# Altium PCB Control_Board.PcbDoc
Units mil, origin at the board's own origin, x right, y up, seen from the top; angles counter-clockwise.
Board outline 4325 x 2580 mil, 2 copper layers (Top Layer, Bottom Layer); 11 components, 10 nets, 65 pads, 860 vias.
Unrouted connection lines stored in the file: 17.
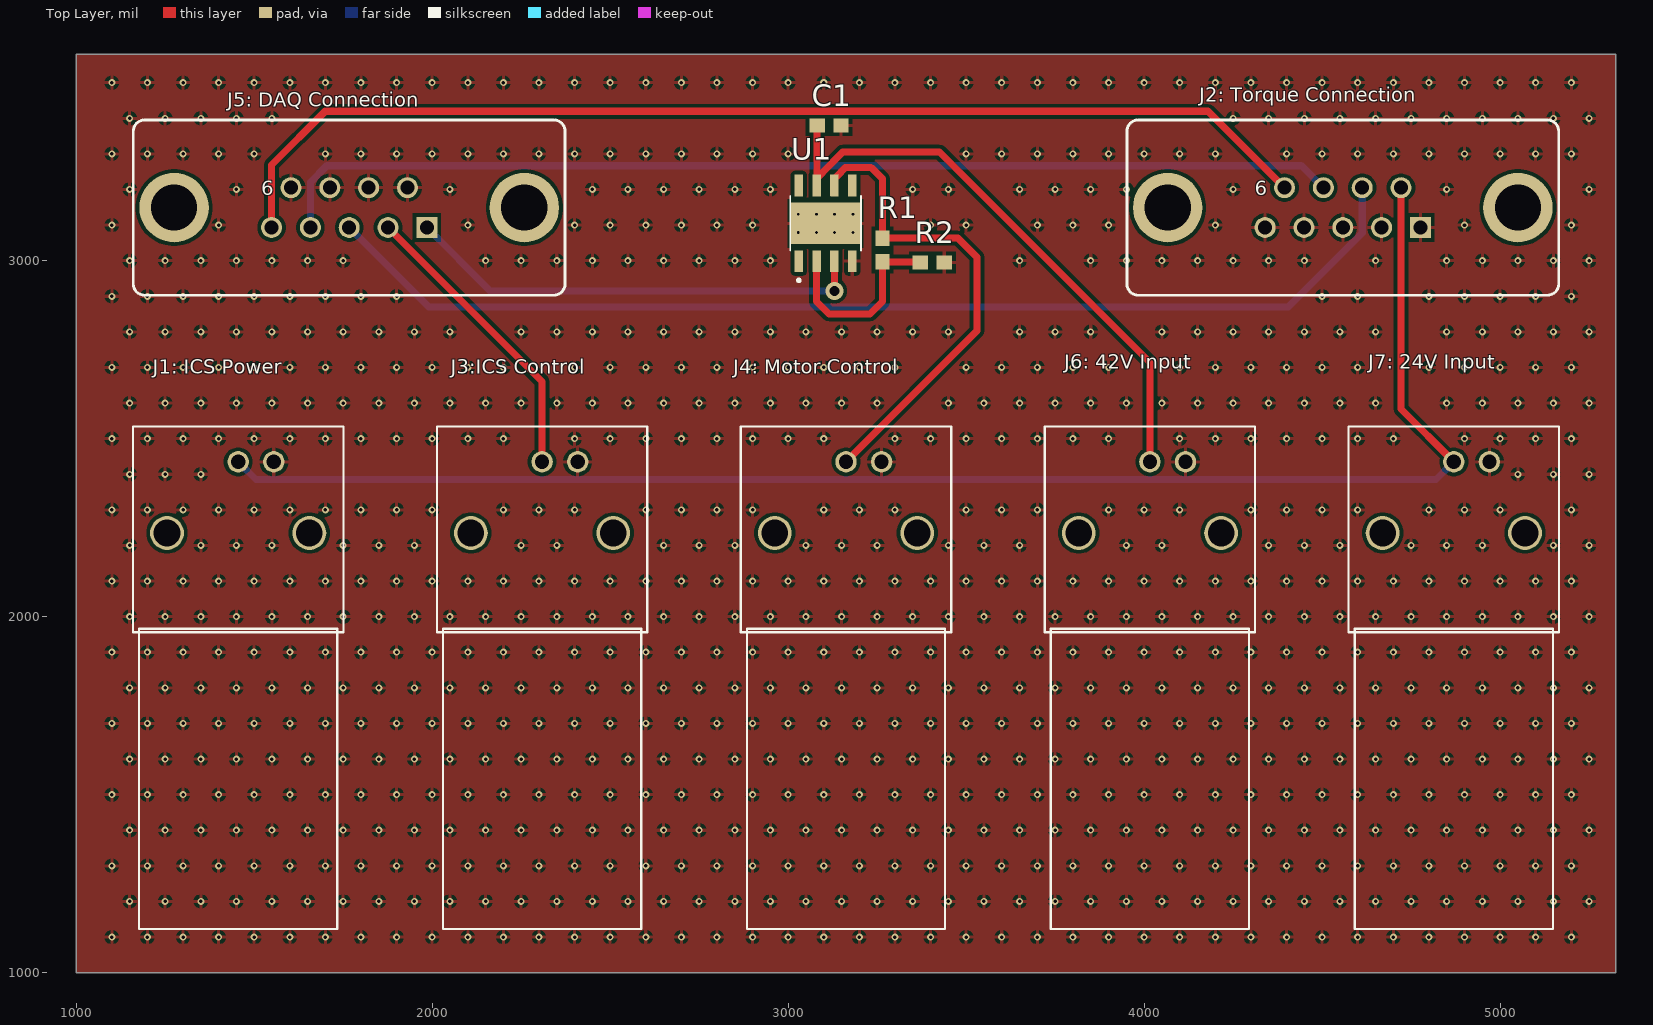
[diagram p0: Top Layer view]
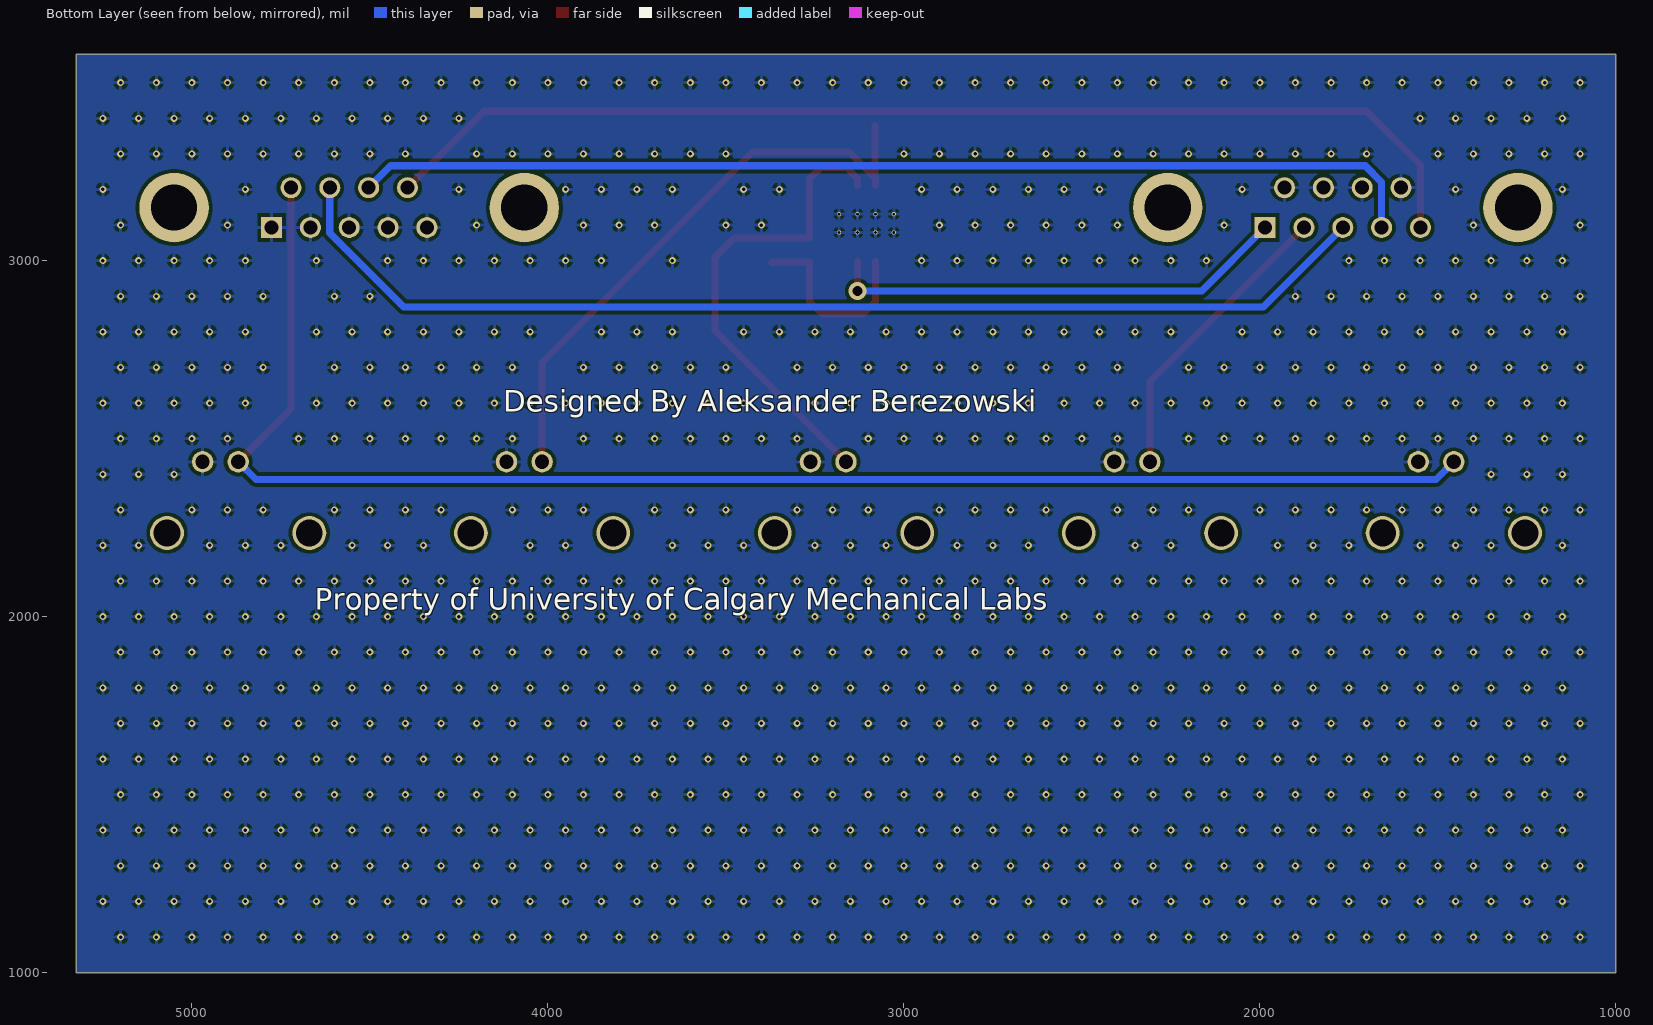
[diagram p1: Bottom Layer view, seen from below]
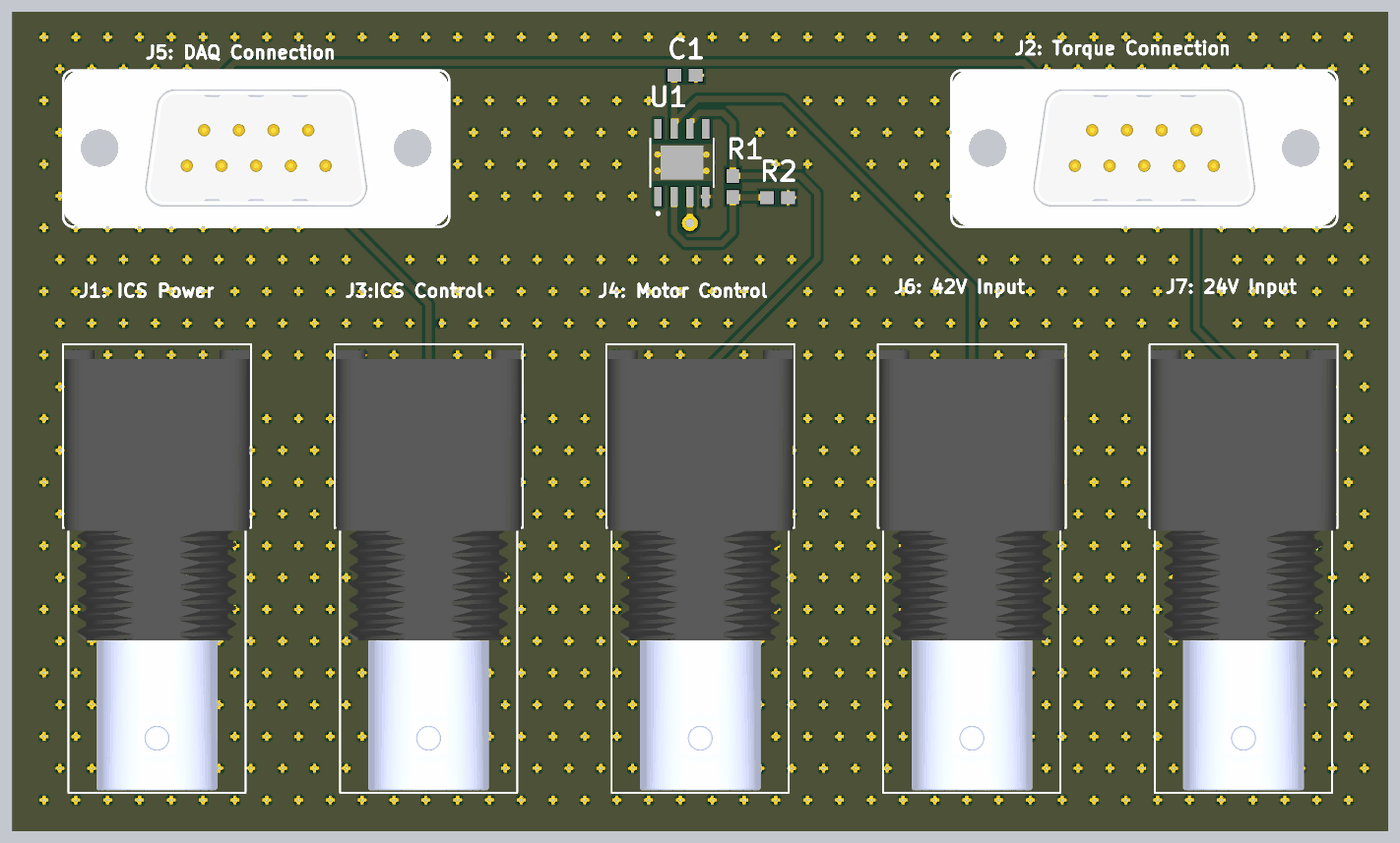
[diagram p2: 3D render of the assembled board from above, using the file's embedded part models]

## Layer stack, top to bottom
Top Solder: solder mask 0.4, Solder Resist, Dk 3.5
Top Layer: signal copper 1.4
Dielectric 1: dielectric 12.6, FR-4, Dk 4.5
Bottom Layer: signal copper 1.4
Bottom Solder: solder mask 0.4, Solder Resist, Dk 3.5

## Board outline
1000,1000 5325,1000 5325,3580 1000,3580

## Design rules (kind name [scope] priority, off if disabled: settings)
Clearance [All] p1: gap=10 ignorepadtopadclearanceinfootprint=FALSE except(0: Arc-Hole Track-Hole SMDPad-Hole THPad-Hole Via-Hole Fill-Hole Poly-Hole Region-Hole Text-Hole)
HoleSize [All] p1: absolutevalues=TRUE maxlimit=200 minlimit=1 maxpercent=80.000 minpercent=20.000
PolygonConnect [All] p1: connectstyle=Relief reliefconductorwidth=10 reliefentries=4 polygonreliefangle="90 Angle" airgapwidth=10
RoutingVias [All] p1: holewidth=28 width=50 viastyle="Through Hole" minholewidth=9 minwidth=19 maxholewidth=28 maxwidth=50
SolderMaskExpansion [All] p1: expansion=4 istentingtop=FALSE
Width [All] p1: maxlimit=20 minlimit=10 preferedwidth=20 minimp=50.000000 maximp=50.000000 favimp=50.000000
29 further rules are at their usual default settings.

## Components (designator, comment, footprint, x,y, rotation, side; value= is the part's Value field where it differs from the comment)
C1 "RF18N0R1B500CT" 0603 3115,3380 r0 top
"J1: ICS Power" "https://www.digikey.ca/en/products/detail/molex/0731375003/1465136" CONN_73137-5003_MOL 1455,2435 r180 top (schematic designator J1)
"J2: Torque Connection" "61800925023" 61800925023 4558.07,3149.09 r180 top (schematic designator J2)
"J3:ICS Control" "https://www.digikey.ca/en/products/detail/molex/0731375003/1465136" CONN_73137-5003_MOL 2308.75,2435 r180 top (schematic designator J3)
"J4: Motor Control" "https://www.digikey.ca/en/products/detail/molex/0731375003/1465136" CONN_73137-5003_MOL 3162.5,2435 r180 top (schematic designator J4)
"J5: DAQ Connection" "61800925023" 61800925023 1766.93,3149.09 r180 top (schematic designator J5)
"J6: 42V Input" "https://www.digikey.ca/en/products/detail/molex/0731375003/1465136" CONN_73137-5003_MOL 4016.25,2435 r180 top (schematic designator J6)
"J7: 24V Input" "https://www.digikey.ca/en/products/detail/molex/0731375003/1465136" CONN_73137-5003_MOL 4870,2435 r180 top (schematic designator J7)
R1 "ERJ3EKF4021V" 0603 3265,3030 r90 top
R2 "ERJ3EKF2051V" 0603 3405,2995 r180 top
U1 "OPA445ADDAR" VREG_LM5017MR/NOPB 3105,3105 r90 top

## Footprints (in the part's own frame and the unit in brackets; to place one, negate y for a bottom-side part, rotate by r counter-clockwise, add the part's x,y. Pads: shape width x height; smd on the part's side, far side on the other; paste and mask are expansions set on the pad)
0603 [mm]
  rect 1.1x1 smd: 1(-0.85,0) 2(0.85,0)
61800925023 [mm] "9 pins, straight"
  rect 1.5x1.5 hole 1: 1(-5.54,1.42)
  round 1.5 hole 1: 2(-2.77,1.42) 3(0,1.42) 4(2.77,1.42) 5(5.54,1.42) 6(-4.155,-1.42) 7(-1.385,-1.42) 8(1.385,-1.42) 9(4.155,-1.42)
  round 4.95 hole 3.3: M1(-12.495,0) M2(12.495,0)
  silkscreen extent -15.41,-6.25 15.41,6.25, body extent -15.41,-6.3 15.4,6.2, height 12.97
CONN_73137-5003_MOL [mil]
  round 60 hole 40 mask+0: 1(0,0) 2(-100,0)
  round 95 hole 75: 3(-200,200) 4(200,200)
  silkscreen extent -296,-99 296,1312, body extent -291,-80 291,1305, height 521
VREG_LM5017MR/NOPB [mm]
  rrect5% 1.55x0.6 smd mask+0: 1(-2.7,1.905) 2(-2.7,0.635) 3(-2.7,-0.635) 4(-2.7,-1.905) 5(2.7,-1.905) 6(2.7,-0.635) 7(2.7,0.635) 8(2.7,1.905)
  round 0.3 hole 0.2: 9(-0.65,1.95) 9(-0.65,-0.65) 9(-0.65,0.65) 9(-0.65,-1.95) 9(0.65,1.95) 9(0.65,-0.65) 9(0.65,0.65) 9(0.65,-1.95)
  rect 2.95x4.9 smd paste-3 mask+0: 9(0,0)
  silkscreen extent -4.17,-2.52 1.95,2.52

## Part data
"J1: ICS Power" "J3:ICS Control" "J4: Motor Control" "J6: 42V Input" "J7: 24V Input": library part 731375003, Mfr_Name="Molex Connector Corporation", Copyright="Copyright (C) 2022 Ultra Librarian. All rights reserved.", Manufacturer_Part_Number=731375003, RefDes=RefDes, Type=DEV
"J2: Torque Connection" "J5: DAQ Connection": library part CMP-1502-00276-1, "Male PCB Connector WR-DSUB, Vertical, 9 pins", Contact Resistance=30mOhm, Manufacturer="Wurth Elektronik", Operating Temperature=-40to85degC, Rated Current=3A, Working Voltage=125VAC, Datasheet URL=https://katalog.we-online.de/em/datasheet/6180xx25023.pdf, Gender=Male, Manufacturer URL=http://www.we-online.de, Mounting Technology=THT, Orientation=Vertical, Package Reference=61800925023, Packaging=Tray, Part Number=61800925023, Pin Number=9, Publisher=WurthElektronik
U1: Package=None, Availability=Unavailable, MP=OPA445ADDAR, Price=None

## Via types
v1: diameter 19.68, hole 9.84, Top Layer to Bottom Layer, 859 vias
v2: diameter 50, hole 28, Top Layer to Bottom Layer, 1 vias

## Nets (pads, with @x,y where several pads share a name; then routed paths per layer and width w, separated by ;. In a path a pad name is that pad's centre, name@x,y a point inside that pad or via, vN(x,y) a via of type N, cw(c..) or ccw(c..) an arc to the next point about the centre after c; other vN are vias at no path point)
24V: "J1: ICS Power.1" "J2: Torque Connection.6" "J7: 24V Input.1" | length 4287.9
  Top Layer w20: 4721.65,3205 4721.65,2583.35 4870,2435
  Bottom Layer w20: 1455,2435 1505,2385 4820,2385 4870,2435
42V: "J6: 42V Input.1" C1.1 U1.7 | length 1660.1
  Top Layer w20: U1.7 3080,3230 U1.7@3080.77,3230.77 ; C1.1 3080.77,3379.23 U1.7@3080.77,3230.77 ; 4016.25,2435 4016.25,2713.75 3425,3305 3153.44,3305 3096.11,3247.67 3096.11,3246.11 U1.7@3080.77,3230.77
DAQ_Vin: "J5: DAQ Connection.1" U1.3 | length 1302.5
  Top Layer w20: v2(3130,2915) U1.3
  Bottom Layer w20: 1985.04,3093.19 2163.23,2915 v2(3130,2915)
GND: "J1: ICS Power.2" "J2: Torque Connection.1" "J2: Torque Connection.2" "J2: Torque Connection.3" "J2: Torque Connection.4" "J2: Torque Connection.5" "J3:ICS Control.2" "J4: Motor Control.2" "J5: DAQ Connection.6" "J5: DAQ Connection.7" "J5: DAQ Connection.8" "J5: DAQ Connection.9" "J6: 42V Input.2" "J7: 24V Input.2" C1.2 R2.1 U1.4 U1.9
  other v1: 1100,1100 1200,1100 1300,1100 1400,1100 1500,1100 1600,1100 1700,1100 1800,1100 1900,1100 2000,1100 2100,1100 2200,1100 2300,1100 2400,1100 2500,1100 2600,1100 2700,1100 2800,1100 2900,1100 3000,1100 3100,1100 3200,1100 3300,1100 3400,1100 3500,1100 3600,1100 3700,1100 3800,1100 3900,1100 4000,1100 4100,1100 4200,1100 4300,1100 4400,1100 4500,1100 4600,1100 4700,1100 4800,1100 4900,1100 5000,1100 5100,1100 5200,1100 1150,1200 1250,1200 1350,1200 1450,1200 1550,1200 1650,1200 1750,1200 1850,1200 1950,1200 2050,1200 2150,1200 2250,1200 2350,1200 2450,1200 2550,1200 2650,1200 2750,1200 2850,1200 2950,1200 3050,1200 3150,1200 3250,1200 3350,1200 3450,1200 3550,1200 3650,1200 3750,1200 3850,1200 3950,1200 4050,1200 4150,1200 4250,1200 4350,1200 4450,1200 4550,1200 4650,1200 4750,1200 4850,1200 4950,1200 5050,1200 5150,1200 5250,1200 1100,1300 1200,1300 1300,1300 1400,1300 1500,1300 1600,1300 1700,1300 1800,1300 1900,1300 2000,1300 2100,1300 2200,1300 2300,1300 2400,1300 2500,1300 2600,1300 2700,1300 2800,1300 2900,1300 3000,1300 3100,1300 3200,1300 3300,1300 3400,1300 3500,1300 3600,1300 3700,1300 3800,1300 3900,1300 4000,1300 4100,1300 4200,1300 4300,1300 4400,1300 4500,1300 4600,1300 4700,1300 4800,1300 4900,1300 5000,1300 5100,1300 5200,1300 1150,1400 1250,1400 1350,1400 1450,1400 1550,1400 1650,1400 1750,1400 1850,1400 1950,1400 2050,1400 2150,1400 2250,1400 2350,1400 2450,1400 2550,1400 2650,1400 2750,1400 2850,1400 2950,1400 3050,1400 3150,1400 3250,1400 3350,1400 3450,1400 3550,1400 3650,1400 3750,1400 3850,1400 3950,1400 4050,1400 4150,1400 4250,1400 4350,1400 4450,1400 4550,1400 4650,1400 4750,1400 4850,1400 4950,1400 5050,1400 5150,1400 5250,1400 1100,1500 1200,1500 1300,1500 1400,1500 1500,1500 1600,1500 1700,1500 1800,1500 1900,1500 2000,1500 2100,1500 2200,1500 2300,1500 2400,1500 2500,1500 2600,1500 2700,1500 2800,1500 2900,1500 3000,1500 3100,1500 3200,1500 3300,1500 3400,1500 3500,1500 3600,1500 3700,1500 3800,1500 3900,1500 4000,1500 4100,1500 4200,1500 4300,1500 4400,1500 4500,1500 4600,1500 4700,1500 4800,1500 4900,1500 5000,1500 5100,1500 5200,1500 1150,1600 1250,1600 1350,1600 1450,1600 1550,1600 1650,1600 1750,1600 1850,1600 1950,1600 2050,1600 2150,1600 2250,1600 2350,1600 2450,1600 2550,1600 2650,1600 2750,1600 2850,1600 2950,1600 3050,1600 3150,1600 3250,1600 3350,1600 3450,1600 3550,1600 3650,1600 3750,1600 3850,1600 3950,1600 4050,1600 4150,1600 4250,1600 4350,1600 4450,1600 4550,1600 4650,1600 4750,1600 4850,1600 4950,1600 5050,1600 5150,1600 5250,1600 1100,1700 1200,1700 1300,1700 1400,1700 1500,1700 1600,1700 1700,1700 1800,1700 1900,1700 2000,1700 2100,1700 2200,1700 2300,1700 2400,1700 2500,1700 2600,1700 2700,1700 2800,1700 2900,1700 3000,1700 3100,1700 3200,1700 3300,1700 3400,1700 3500,1700 3600,1700 3700,1700 3800,1700 3900,1700 4000,1700 4100,1700 4200,1700 4300,1700 4400,1700 4500,1700 4600,1700 4700,1700 4800,1700 4900,1700 5000,1700 5100,1700 5200,1700 1150,1800 1250,1800 1350,1800 1450,1800 1550,1800 1650,1800 1750,1800 1850,1800 1950,1800 2050,1800 2150,1800 2250,1800 2350,1800 2450,1800 2550,1800 2650,1800 2750,1800 2850,1800 2950,1800 3050,1800 3150,1800 3250,1800 3350,1800 3450,1800 3550,1800 3650,1800 3750,1800 3850,1800 3950,1800 4050,1800 4150,1800 4250,1800 4350,1800 4450,1800 4550,1800 4650,1800 4750,1800 4850,1800 4950,1800 5050,1800 5150,1800 5250,1800 1100,1900 1200,1900 1300,1900 1400,1900 1500,1900 1600,1900 1700,1900 1800,1900 1900,1900 2000,1900 2100,1900 2200,1900 2300,1900 2400,1900 2500,1900 2600,1900 2700,1900 2800,1900 2900,1900 3000,1900 3100,1900 3200,1900 3300,1900 3400,1900 3500,1900 3600,1900 3700,1900 3800,1900 3900,1900 4000,1900 4100,1900 4200,1900 4300,1900 4400,1900 4500,1900 4600,1900 4700,1900 4800,1900 4900,1900 5000,1900 5100,1900 5200,1900 1150,2000 1250,2000 1350,2000 1450,2000 1550,2000 1650,2000 1750,2000 1850,2000 1950,2000 2050,2000 2150,2000 2250,2000 2350,2000 2450,2000 2550,2000 2650,2000 2750,2000 2850,2000 2950,2000 3050,2000 3150,2000 3250,2000 3350,2000 3450,2000 3550,2000 3650,2000 3750,2000 3850,2000 3950,2000 4050,2000 4150,2000 4250,2000 4350,2000 4450,2000 4550,2000 4650,2000 4750,2000 4850,2000 4950,2000 5050,2000 5150,2000 5250,2000 1100,2100 1200,2100 1300,2100 1400,2100 1500,2100 1600,2100 1700,2100 1800,2100 1900,2100 2000,2100 2100,2100 2200,2100 2300,2100 2400,2100 2500,2100 2600,2100 2700,2100 2800,2100 2900,2100 3000,2100 3100,2100 3200,2100 3300,2100 3400,2100 3500,2100 3600,2100 3700,2100 3800,2100 3900,2100 4000,2100 4100,2100 4200,2100 4300,2100 4400,2100 4500,2100 4600,2100 4700,2100 4800,2100 4900,2100 5000,2100 5100,2100 5200,2100 1150,2200 1350,2200 1450,2200 1550,2200 1750,2200 1850,2200 1950,2200 2250,2200 2350,2200 2650,2200 2750,2200 2850,2200 3050,2200 3150,2200 3250,2200 3450,2200 3550,2200 3650,2200 3950,2200 4050,2200 4350,2200 4450,2200 4550,2200 4750,2200 4850,2200 4950,2200 5150,2200 5250,2200 1100,2300 1200,2300 1300,2300 1400,2300 1500,2300 1600,2300 1700,2300 1800,2300 1900,2300 2000,2300 2200,2300 2300,2300 2400,2300 2600,2300 2700,2300 2800,2300 2900,2300 3100,2300 3200,2300 3300,2300 3500,2300 3600,2300 3700,2300 3900,2300 4000,2300 4100,2300 4300,2300 4400,2300 4500,2300 4600,2300 4800,2300 4900,2300 5000,2300 5200,2300 1150,2400 1250,2400 1350,2400 5050,2400 5150,2400 5250,2400 1100,2500 1200,2500 1300,2500 1400,2500 1500,2500 1600,2500 1700,2500 1800,2500 1900,2500 2000,2500 2100,2500 2200,2500 2400,2500 2500,2500 2600,2500 2700,2500 2800,2500 2900,2500 3000,2500 3100,2500 3300,2500 3400,2500 3500,2500 3600,2500 3700,2500 3800,2500 3900,2500 4100,2500 4200,2500 4300,2500 4400,2500 4500,2500 4600,2500 4700,2500 4900,2500 5000,2500 5100,2500 5200,2500 1150,2600 1250,2600 1350,2600 1450,2600 1550,2600 1650,2600 1750,2600 1850,2600 1950,2600 2050,2600 2150,2600 2250,2600 2350,2600 2450,2600 2550,2600 2650,2600 2750,2600 2850,2600 2950,2600 3050,2600 3150,2600 3250,2600 3450,2600 3550,2600 3650,2600 3750,2600 3850,2600 3950,2600 4050,2600 4150,2600 4250,2600 4350,2600 4450,2600 4550,2600 4650,2600 4850,2600 4950,2600 5050,2600 5150,2600 5250,2600 1100,2700 1200,2700 1300,2700 1400,2700 1500,2700 1600,2700 1700,2700 1800,2700 1900,2700 2000,2700 2100,2700 2200,2700 2400,2700 2500,2700 2600,2700 2700,2700 2800,2700 2900,2700 3000,2700 3100,2700 3200,2700 3300,2700 3500,2700 3600,2700 3700,2700 3800,2700 3900,2700 4100,2700 4200,2700 4300,2700 4400,2700 4500,2700 4600,2700 4800,2700 4900,2700 5000,2700 5100,2700 5200,2700 1150,2800 1250,2800 1350,2800 1450,2800 1550,2800 1650,2800 1750,2800 1850,2800 1950,2800 2050,2800 2250,2800 2350,2800 2450,2800 2550,2800 2650,2800 2750,2800 2850,2800 2950,2800 3050,2800 3150,2800 3250,2800 3350,2800 3450,2800 3650,2800 3750,2800 3850,2800 4050,2800 4150,2800 4250,2800 4350,2800 4450,2800 4550,2800 4650,2800 4850,2800 4950,2800 5050,2800 5150,2800 5250,2800 1100,2900 1200,2900 1300,2900 1400,2900 1500,2900 1600,2900 1700,2900 1800,2900 1900,2900 4500,2900 4600,2900 4800,2900 4900,2900 5000,2900 5100,2900 5200,2900 1150,3000 1250,3000 1350,3000 1450,3000 1550,3000 1650,3000 1750,3000 2150,3000 2250,3000 2350,3000 2450,3000 2550,3000 2650,3000 2750,3000 2850,3000 2950,3000 3650,3000 3850,3000 3950,3000 4050,3000 4150,3000 4250,3000 4350,3000 4450,3000 4650,3000 4850,3000 4950,3000 5050,3000 5150,3000 5250,3000 1100,3100 1400,3100 2100,3100 2400,3100 2500,3100 2600,3100 2700,3100 2800,3100 2900,3100 3400,3100 3500,3100 3700,3100 3800,3100 3900,3100 4200,3100 4900,3100 5200,3100 1150,3200 1450,3200 2050,3200 2450,3200 2550,3200 2650,3200 2750,3200 2850,3200 2950,3200 3350,3200 3450,3200 3650,3200 3750,3200 3850,3200 3950,3200 4250,3200 4850,3200 5250,3200 1100,3300 1200,3300 1300,3300 1400,3300 1500,3300 1700,3300 1800,3300 1900,3300 2000,3300 2100,3300 2200,3300 2300,3300 2400,3300 2500,3300 2600,3300 2700,3300 2800,3300 2900,3300 3000,3300 3500,3300 3600,3300 3700,3300 3800,3300 3900,3300 4000,3300 4100,3300 4200,3300 4400,3300 4500,3300 4600,3300 4700,3300 4800,3300 4900,3300 5000,3300 5100,3300 5200,3300 1150,3400 1250,3400 1350,3400 1450,3400 1550,3400 4250,3400 4350,3400 4450,3400 4550,3400 4650,3400 4750,3400 4850,3400 4950,3400 5050,3400 5150,3400 5250,3400 1100,3500 1200,3500 1300,3500 1400,3500 1500,3500 1600,3500 1700,3500 1800,3500 1900,3500 2000,3500 2100,3500 2200,3500 2300,3500 2400,3500 2500,3500 2600,3500 2700,3500 2800,3500 2900,3500 3000,3500 3100,3500 3200,3500 3300,3500 3400,3500 3500,3500 3600,3500 3700,3500 3800,3500 3900,3500 4000,3500 4100,3500 4200,3500 4300,3500 4400,3500 4500,3500 4600,3500 4700,3500 4800,3500 4900,3500 5000,3500 5100,3500 5200,3500
ICS_Control: "J3:ICS Control.1" "J5: DAQ Connection.2" | length 837.4
  Top Layer w20: 1875.99,3093.19 2308.75,2660.43 2308.75,2435
Motor_Vout: "J4: Motor Control.1" R1.2 U1.6 | length 1361.9
  Top Layer w20: U1.6 3130,3230 3148.19,3248.19 3148.19,3249.75 3160.25,3261.81 3233.19,3261.81 3265,3230 R1.2 3476.54,3063.46 3530,3010 3530,2802.5 3162.5,2435
NetR1_1: R1.1 R2.2 U1.2 | length 546.4
  Top Layer w20: U1.2 3080,2885 3115,2850 3230,2850 3265,2885 R1.1 3265.77,2995.77 3370.77,2995.77 R2.2
Speed_Sensor: "J2: Torque Connection.8" "J5: DAQ Connection.4" | length 3017.5
  Bottom Layer w20: 1657.88,3093.19 1657.88,3220.52 1703.9,3266.54 4442,3266.54 4503.54,3205
Torque_On: "J2: Torque Connection.9" "J5: DAQ Connection.5" | length 3172.7
  Top Layer w20: 1548.82,3093.19 1548.82,3268.82 1699.69,3419.69 4179.8,3419.69 4394.48,3205
Torque_Output: "J2: Torque Connection.7" "J5: DAQ Connection.3" | length 3151.5
  Bottom Layer w20: 1766.93,3093.19 1990.12,2870 4404.92,2870 4612.59,3077.67 4612.59,3205
pads on no net: "J1: ICS Power.3" "J1: ICS Power.4" "J2: Torque Connection.M1" "J2: Torque Connection.M2" "J3:ICS Control.3" "J3:ICS Control.4" "J4: Motor Control.3" "J4: Motor Control.4" "J5: DAQ Connection.M1" "J5: DAQ Connection.M2" "J6: 42V Input.3" "J6: 42V Input.4" "J7: 24V Input.3" "J7: 24V Input.4" U1.1 U1.5 U1.8

## Polygon pours and split planes (outlines as drawn)
GND on Top Layer "GND_L01_P000" (solid, pour order 0): 1000,1000 5325,1000 5325,3580 1000,3580
GND on Bottom Layer "GND_L02_P001" (solid, pour order 1): 1000,1000 5325,1000 5325,3580 1000,3580

## Silkscreen, mask and mechanical layers (free items; w line width, h text height)
Bottom Overlay:
  text "Designed By Aleksander Berezowski" at 4125,2574.99 h60
  text "Property of University of Calgary Mechanical Labs" at 4655,2019.99 h60

## Text inside footprints (layer, text, board x,y; h text height)
"J1: ICS Power": Mechanical 13 "*" at 1567.5,2460 h50 r180
"J2: Torque Connection": Top Overlay "9" at 4345.47,3223.9 h40 r180
"J3:ICS Control": Mechanical 13 "*" at 2421.25,2460 h50 r180
"J4: Motor Control": Mechanical 13 "*" at 3275,2460 h50 r180
"J5: DAQ Connection": Top Overlay "9" at 1554.33,3223.9 h40 r180
"J6: 42V Input": Mechanical 13 "*" at 4128.75,2460 h50 r180
"J7: 24V Input": Mechanical 13 "*" at 4982.5,2460 h50 r180